# Altium PCB c1yc_ldm.PcbDoc (part 1 of 2)
Units mm, origin at the board's own origin, x right, y up, seen from the top; angles counter-clockwise.
Board outline 258.33 x 60.81 mm, 2 copper layers (Top Layer, Bottom Layer); 98 components, 53 nets, 234 pads, 310 vias.
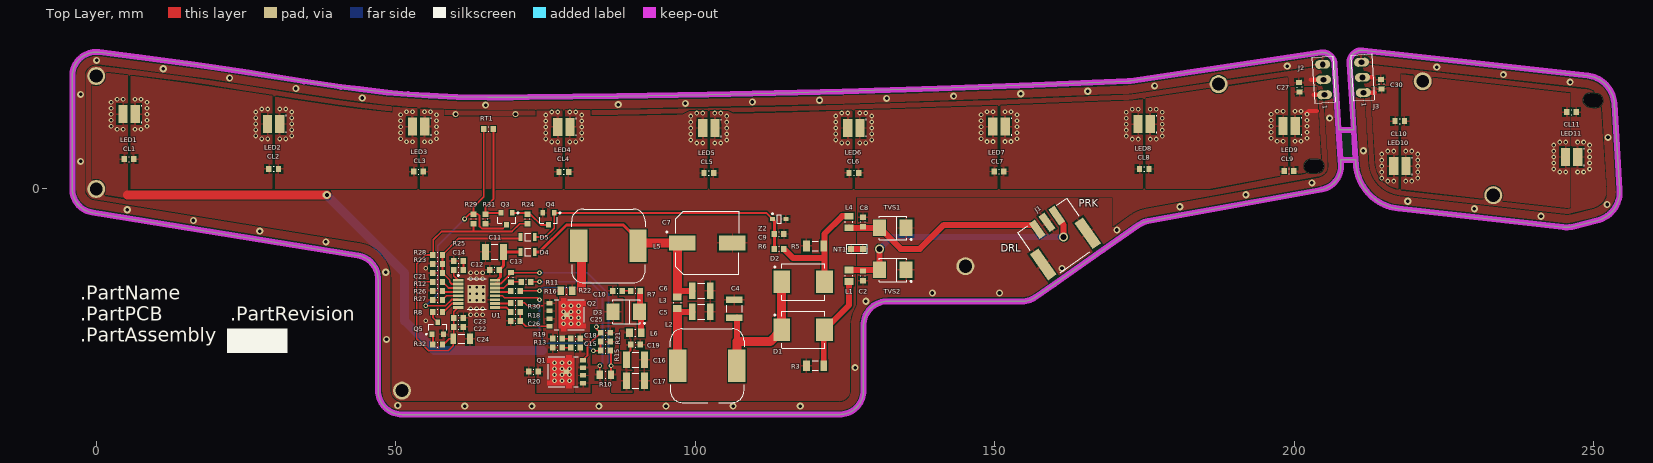
[diagram p0: Top Layer view]
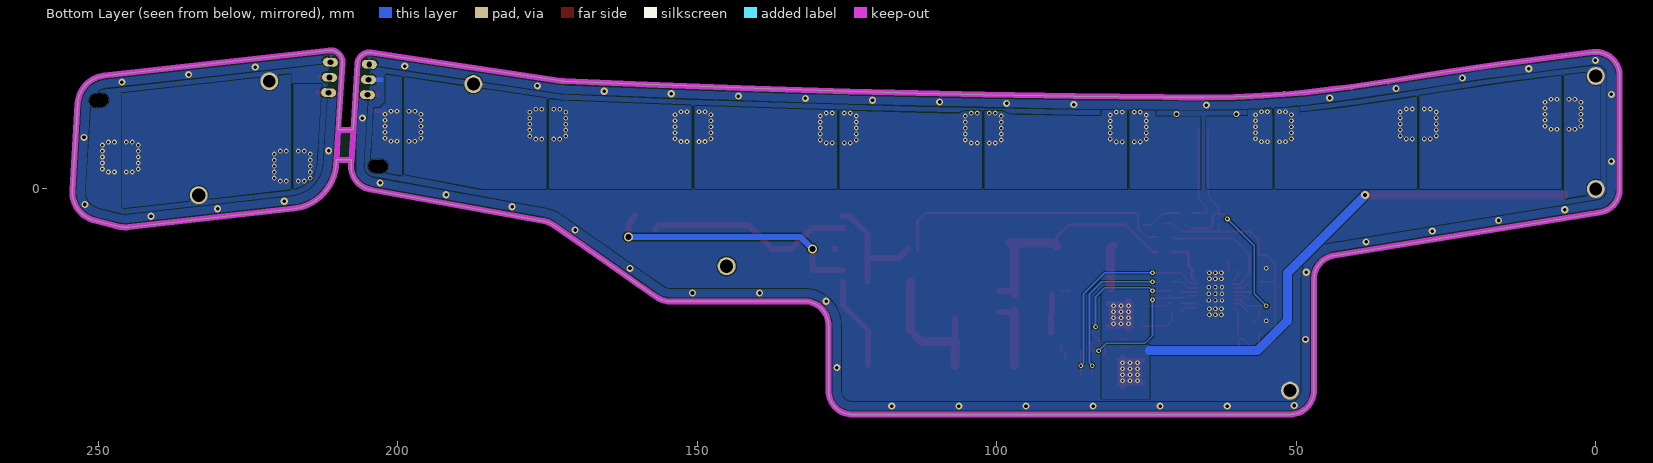
[diagram p1: Bottom Layer view, seen from below]

## Layer stack, top to bottom
Top Solder: solder mask 0.0102, Solder Resist, Dk 3.5
Top Layer: signal copper 0.0356
Dielectric1: dielectric 0.32, FR-4, Dk 4.8
Bottom Layer: signal copper 0.0356
Bottom Solder: solder mask 0.0102, Solder Resist, Dk 3.5

## Board outline
47.051,-33.654 ccw(c51.051,-33.654) 51.051,-37.654 124.084,-37.654 ccw(c124.084,-33.654) 128.084,-33.654 128.084,-22.763 cw(c132.084,-22.763) 132.084,-18.763 154.542,-18.763 ccw(c154.542,-14.763) 156.836,-18.039 159.855,-15.926 168.046,-10.19 174,-6.021 cw(c176.294,-9.298) 175.581,-5.362 204.501,-0.121 ccw(c203.788,3.815) 207.78,4.064 207.73,4.863 210.235,4.863 210.278,4.172 ccw(c218.263,4.671) 217.367,-3.279 244.89,-6.379 ccw(c245.45,-1.41) 246.668,-6.26 250.546,-5.285 ccw(c249.328,-0.436) 254.318,-0.124 253.42,14.259 ccw(c248.43,13.947) 248.989,18.916 211.445,23.145 ccw(c211.221,21.157) 209.225,21.033 209.923,9.863 207.418,9.863 206.728,20.917 ccw(c204.732,20.792) 204.436,22.77 172.683,18.027 cw(c172.092,21.983) 172.257,17.987 172.257,17.988 cw(c15.57,3785.374) 124.644,16.309 113.317,16.009 102.13,15.754 87.024,15.485 72.152,15.325 69.51,15.309 65.368,15.303 60.194,15.382 55.543,15.578 52.059,15.814 48.579,16.127 43.944,16.653 40.857,17.063 34.69,17.982 25.447,19.456 19.285,20.396 15.177,20.975 6.956,22.031 0.492,22.833 ccw(c0,18.863) -4,18.863 -4,0 ccw(c0,0) -0.638,-3.949 43.688,-11.107 cw(c43.051,-15.055) 47.051,-15.055

## Design rules (kind name [scope] priority, off if disabled: settings)
Clearance Clearance_Gnd [(InNamedPolygon('Top Ground') OR InNamedPolygon('Bottom Ground')) vs (OnLayer('Keep-Out Layer'))] p1: gap=1.75
Clearance Clearance_LED [(InNamedPolygon('Top LED') OR InNamedPolygon('Bottom LED')) vs (OnLayer('Keep-Out Layer'))] p2: gap=2.75
Clearance Clearance_Edge_LED [(InNamedPolygon('Top Edge LED') OR InNamedPolygon('Bottom Edge LED')) vs (OnLayer('Keep-Out Layer'))] p3: gap=1.75
Clearance Clearance_Dual_LED [(InNamedPolygon('Top Dual LED') OR InNamedPolygon('Bottom Dual LED')) vs (OnLayer('Keep-Out Layer'))] p4: gap=2.75
Clearance [All] p5: gap=0.2
HoleSize [All] p1: absolutevalues=TRUE maxlimit=5 minlimit=0.025 maxpercent=80.000 minpercent=20.000
MinimumAnnularRing [All] p1: minimumring=0.127
MinimumSolderMaskSliver [All] p1: minsoldermaskwidth=0.152
PolygonConnect PolygonConnect_Direct [InComponentClass('Direct')] p1: connectstyle=Direct reliefconductorwidth=0.254 reliefentries=4 polygonreliefangle="90 Angle" airgapwidth=0.254
PolygonConnect PolygonConnect_Via [IsVia] p2: connectstyle=Direct reliefconductorwidth=0.254 reliefentries=4 polygonreliefangle="90 Angle" airgapwidth=0.254
PolygonConnect PolygonConnect_Mount [InPadClass('Mount')] p3: connectstyle=Direct reliefconductorwidth=0.254 reliefentries=4 polygonreliefangle="90 Angle" airgapwidth=0.254
PolygonConnect [All] p4: connectstyle=Relief reliefconductorwidth=0.3 reliefentries=4 polygonreliefangle="90 Angle" airgapwidth=0.3
RoutingVias [All] p1: holewidth=0.4 width=0.8 viastyle="Through Hole" minholewidth=0.4 minwidth=0.8 maxholewidth=1 maxwidth=2
SilkToSilkClearance [All] p1: silktosilkclearance=0.152
SilkToSolderMaskClearance [IsPad] p1: minsilkscreentomaskgap=0.152 clearancetoexposedcopper=TRUE
SolderMaskExpansion [All] p1: expansion=0.102
Width [All] p1: maxlimit=2 minlimit=0.3 preferedwidth=0.3
26 further rules are at their usual default settings.

## Classes and differential pairs
component class DualFootprintDiode: D1 D2
pad class Mount: Free-0 Free-1 Free-3 Free-4 Free-5 U1-17

## Components (designator, comment, footprint, x,y, rotation, side; value= is the part's Value field where it differs from the comment)
C2 "100nF" CAPC0603(1608)100_N 128,-14.5 r90 top
C4 "2.2uF" CAPC1210(3225)230_N 106.5,-20 r270 top
C5 "2.2uF" CAPC1210(3225)230_N 101,-20.5 r180 top
C6 "4.7uF" CAPC1210(3225)280_N 101,-17 r180 top
C7 "100u, 50V" "146CT1 Series 1010" 102,-9 r0 top
C8 "100nF" CAPC0603(1608)100_N 128,-5.535 r270 top
C9 "100nF" CAPC0603(1608)100_N 114,-7.5 r180 top
C10 "2.2nF" CAPC0603(1608)100_N 87,-17 r180 top
C11 "2.2uF" CAPC1210(3225)230_N 66.5,-10.5 r0 top
C12 "100nF" CAPC0603(1608)100_N 66.5,-13.5 r0 top
C13 "100nF" CAPC0603(1608)100_N 69.25,-14.75 r90 top
C14 "330nF" CAPC0603(1608)100_N 60.5,-13.5 r180 top
C15 "2.2nF" CAPC0603(1608)100_N 80,-26.5 r180 top
C16 "4.7uF" CAPC1210(3225)280_N 90,-28.5 r180 top
C17 "4.7uF" CAPC1210(3225)280_N 90,-32 r180 top
C18 "2.2nF" CAPC0603(1608)100_N 80,-25 r180 top
C19 "100nF" CAPC0603(1608)100_N 90,-26 r180 top
C21 "10nF" CAPC0603(1608)100_N 57,-14 r0 top
C22 "100nF" CAPC0603(1608)100_N 60.5,-23 r180 top
C23 "1uF" CAPC0603(1608)100_N 60.5,-21.5 r180 top
C24 "10uF" CAPC1206(3216)190_L 61,-25 r180 top
C25 "10nF" CAPC0603(1608)100_N 85,-24 r180 top
C26 "10nF" CAPC0603(1608)100_N 70,-22 r0 top
C27 "10nF" CAPC0603(1608)100_N 200.843,16.993 r273 top
C30 "10nF" CAPC0603(1608)100_N 214.5,17.5 r273 top
CL1 "10nF" CAPC0603(1608)100_N 5.48,4.982 r180 top
CL2 "10nF" CAPC0603(1608)100_N 29.63,3.358 r180 top
CL3 "10nF" CAPC0603(1608)100_N 53.805,2.898 r180 top
CL4 "10nF" CAPC0603(1608)100_N 78.05,2.854 r180 top
CL5 "10nF" CAPC0603(1608)100_N 102.259,2.67 r180 top
CL6 "10nF" CAPC0603(1608)100_N 126.468,2.687 r180 top
CL7 "10nF" CAPC0603(1608)100_N 150.708,2.901 r180 top
CL8 "10nF" CAPC0603(1608)100_N 174.95,3.322 r180 top
CL9 "10nF" CAPC0603(1608)100_N 199.124,2.975 r180 top
CL10 "10nF" CAPC0603(1608)100_N 217.604,11.318 r180 top
CL11 "10nF" CAPC0603(1608)100_N 246.298,12.831 r180 top
D1 "3A" NRVBS3 118,-23.5 r0 top
D2 "3A" NRVBS3 118,-15.5 r0 top
D3 "2A" "OnSemi SMB Case 403A-03" 88.5,-20.5 r180 top
D4 "1N4148WS" SOD323F 72,-10.5 r0 top
D5 "1N4148WS" SOD323F 72,-8 r0 top
J1 "502352-0300" 502352-0300 163.377,-12.239 r35 top locked
J2 "A03-P029-A" A03-P029-A 204.89,18.257 r273.58 top
J3 "A03-P029-A" A03-P029-A 211.38,18.622 r273.58 top
L1 "30R" BLM21PG 125.668,-14.5 r90 top
L2 "33uH" CDRH127/L125 102,-29.5 r90 top
L3 "120R" BLM21PG 97,-19 r270 top
L4 "30R" BLM21PG 125.668,-5.5 r270 top
L5 "47uH" CDRH127/L125 85.5,-9.5 r90 top
L6 "120R" BLM21PG 90,-24 r0 top
LED1 "NJSW172" NJSW172 5.48,12.482 r180 top
LED2 "NJSW172" NJSW172 29.633,10.859 r180 top
LED3 "NJSW172" NJSW172 53.806,10.398 r180 top
LED4 "NJSW172" NJSW172 78.049,10.354 r180 top
LED5 "NJSW172" NJSW172 102.262,10.17 r180 top
LED6 "NJSW172" NJSW172 126.469,10.187 r180 top
LED7 "NJSW172" NJSW172 150.708,10.401 r180 top
LED8 "NJSW172" NJSW172 174.95,10.821 r180 top
LED9 "NJSW172" NJSW172 199.124,10.475 r180 top
LED10 "NJSW172" NJSW172 217.605,3.818 r180 top
LED11 "NJSW172" NJSW172 246.298,5.331 r180 top
NT1 "Net Tie" Net_Tie_SMT_1mm 127,-10 r180 top net-tie
Q1 "NVMFS5113PL" "ONSEMI DFN5 5x6 CASE 488AA Issue H" 78.5,-30.5 r270 top
Q2 "NVMFS5826NL" "ONSEMI DFN5 5x6 CASE 488AA Issue H" 78.5,-21 r90 top
Q3 "2V7002L" "OnSemi SOT-23 Case 318-08 Issue AP" 68.5,-5 r270 top
Q4 "2V7002L" "OnSemi SOT-23 Case 318-08 Issue AP" 75.5,-5 r270 top
Q5 "2V7002L" "OnSemi SOT-23 Case 318-08 Issue AP" 57,-23.25 r90 top
R3 "1K" RESC1206(3216)_N 120,-29.5 r0 top
R5 "1K" RESC1206(3216)_N 120,-9.5 r0 top
R6 "10K" RESC0603(1608)_N 114,-10 r0 top
R7 "10R" RESC0603(1608)_N 90,-17 r180 top
R8 "15K" RESC0603(1608)_N 57,-20.5 r0 top
R10 "Bin Table" RESC0805(2012)_N 85,-31 r0 top
R11 "150R" RESC0603(1608)_N 71.75,-15.5 r0 top
R12 "10K" RESC0603(1608)_N 57,-15.5 r180 top
R13 "10R" RESC0603(1608)_N 77,-26.5 r180 top
R15 "4K3" RESC0603(1608)_N 85,-27 r0 top
R16 "150R" RESC0603(1608)_N 70,-17 r0 top
R18 "0R" RESC0603(1608)_N 70,-20.5 r0 top
R19 "10R" RESC0603(1608)_N 77,-25 r180 top
R20 "10K" RESC0603(1608)_N 73,-30.5 r0 top
R21 "180K" RESC0603(1608)_N 85,-25.5 r180 top
R22 "0.039R" RESC0805(2012)_N 78.5,-17 r180 top
R23 "10K" RESC0603(1608)_N 57,-12.5 r0 top
R24 "10K" RESC0603(1608)_N 72,-5 r270 top
R25 "270R" RESC0603(1608)_N 60.5,-12 r0 top
R26 "75K" RESC0603(1608)_N 57,-17 r0 top
R27 "100K" RESC0603(1608)_N 57,-18.5 r0 top
R28 "100K" RESC0603(1608)_N 57,-11 r180 top
R29 "510R" RESC0603(1608)_N 63,-5 r270 top
R30 "1.5K" RESC0603(1608)_N 70,-19 r0 top
R31 "39R" RESC0603(1608)_N 65,-5 r90 top
R32 "10K" RESC0603(1608)_N 57,-26 r0 top
RT1 "10K" RESC0603(1608)_N 65.5,10 r180 top
TVS1 "1SMB36" "OnSemi SMB Case 403C-01" 133,-13.5 r180 top
TVS2 "1SMB36" "OnSemi SMB Case 403C-01" 133,-6.5 r180 top
U1 "A6271" A6268_LP 63.5,-17.5 r0 top
Z2 "5v1" MM3Z 114,-5 r0 top

## Footprints (in the part's own frame and the unit in brackets; to place one, negate y for a bottom-side part, rotate by r counter-clockwise, add the part's x,y. Pads: shape width x height; smd on the part's side, far side on the other; paste and mask are expansions set on the pad)
"146CT1 Series 1010" [mm] "Size Code 1010, Electrolytic Vishay"
  rect 4.4x2.5 smd: 1(-4.2,0) 2(4.2,0)
  silkscreen extent -6.87,-5.25 5.25,5.25, body extent -6.05,-5.25 6.05,5.25, height 10.55
502352-0300 [mm] "Duraclik header, right angle SMT, 3 circuits"
  rect 1.2x3.2 smd: 1(2,8.13) 2(0,8.13) 3(-2,8.13)
  rect 1.7x5.3 smd: 4(4.55,2.75) 5(-4.55,2.75)
  silkscreen extent -5,0 5,9.5, body extent -5,0 5,9.4, height 6.41
A03-P029-A [mm] "Panta 3 pin flex ribbon"
  oval 1.5x2.5 hole 0.95: 1(2.54,0) 2(0,0) 3(-2.54,0)
  silkscreen extent -3.81,-1.75 3.81,1.75
A6268_LP [mm] "TSSOP with exposed thermal pad"
  rect 1.7x0.45 smd: 1(-3.05,2.275) 2(-3.05,1.625) 3(-3.05,0.975) 4(-3.05,0.325) 5(-3.05,-0.325) 6(-3.05,-0.975) 7(-3.05,-1.625) 8(-3.05,-2.275) 9(3.05,-2.275) 10(3.05,-1.625) 11(3.05,-0.975) 12(3.05,-0.325) 13(3.05,0.325) 14(3.05,0.975) 15(3.05,1.625) 16(3.05,2.275)
  rect 3x3 smd: 17(0,0)
  silkscreen extent -3.17,-2.55 1.6,3.17, body extent -2.25,-2.55 2.25,2.55, height 1.2
BLM21PG [mm] "Chip Inductor, 2-Leads, Body 2.00x1.25mm, IPC Medium Density"
  rect 1.13x1.45 smd: 1(-0.965,0) 2(0.965,0)
  silkscreen extent -0.1,-0.63 0.1,0.63, body extent -1.1,-0.72 1.1,0.72, height 1.05
CAPC0603(1608)100_N [mm] "Chip Capacitor, Body 1.6x0.8mm, Height 1.0mm, IPC Medium Density"
  rect 0.9x1 smd: 1(-0.8,0) 2(0.8,0)
  silkscreen extent -0.05,-0.4 0.05,0.4, body extent -0.87,-0.48 0.88,0.47, height 1
CAPC1206(3216)190_L [mm] "Chip Capacitor, Body 3.2x1.6mm, Height 1.9mm, IPC High Density"
  rect 0.95x1.7 smd: 1(-1.4,0) 2(1.4,0)
  silkscreen extent -0.55,-0.75 0.55,0.75, body extent -1.7,-0.9 1.7,0.9, height 1.9
CAPC1210(3225)230_N [mm] "Chip Capacitor, Body 3.2x2.5mm, Height 2.3mm, IPC Medium Density"
  rect 1.15x2.7 smd: 1(-1.5,0) 2(1.5,0)
  silkscreen extent -0.55,-1.25 0.55,1.25, body extent -1.7,-1.35 1.7,1.35, height 2.3
CAPC1210(3225)280_N [mm] "Chip Capacitor, Body 3.2x2.5mm, Height 2.8mm, IPC Medium Density"
  rect 1.15x2.7 smd: 1(-1.5,0) 2(1.5,0)
  silkscreen extent -0.55,-1.25 0.55,1.25, body extent -1.7,-1.4 1.7,1.4, height 2.8
CDRH127/L125 [mm] "Sumida SMD Shielded Automotive Power Inductor"
  rect 5.4x2.9 smd: 1(0,4.95) 2(0,-4.95)
  silkscreen extent -6.15,-6.15 6.15,6.15, body extent -6.16,-6.16 6.16,6.16, height 8
MM3Z [mm] "TSOP, 2-Leads, Body 1.25x1.70mm, Pitch 1.27mm, IPC Medium Density"
  rect 0.83x0.63 smd: 1(-1.115,0) 2(1.115,0)
  silkscreen extent -1.24,-0.7 0.35,0.99, body extent -0.9,-0.7 0.9,0.7, height 1.1
Net_Tie_SMT_1mm [mm] "SMT Net Tie - 1mm trace width"
  rect 1x1 smd: 1(-1,0) 2(1,0)
  Top Layer region: -0.5,-0.5 0.5,-0.5 0.5,0.5 -0.5,0.5
  silkscreen extent -1.75,-0.75 1.75,0.75
NJSW172 [mm] "Nichia White LED"
  rect 1.55x3 smd: 1(-1.025,0) 2(1.025,0)
  silkscreen extent -2.1,-1.5 -2.1,1.5, body extent -1.5,-1.5 1.5,1.5, height 0.81
NRVBS3 [mil] "Molded Diode, 2-Leads, Body 6.85x5.84mm, IPC Medium Density"
  rect 110x150 smd: 1(-140.49,0) 2(140.49,0)
  silkscreen extent -191,-120 142,120, body extent -140,-120 140,120, height 95
"ONSEMI DFN5 5x6 CASE 488AA Issue H" [mm] "ONSEMI DFN5 5x6 SO-8FL CASE 488AA Issue H"
  rect 0.75x1 smd: 1(1.905,2.795) 2(0.635,2.795) 3(-0.635,2.795) 4(-1.905,2.795) 5(0,0)
  Top Layer region: -2.775,0 -2.775,0.905 -2.28,0.905 -2.28,1.33 2.28,1.33 2.28,0.905 2.775,0.905 2.775,0 2.28,0 2.28,-3.2 1.53,-3.2 1.53,-2.725 -1.53,-2.725 -1.53,-3.2 -2.28,-3.2 -2.28,0
  silkscreen extent -2.5,-3 2.5,2, body extent -2.5,-3 2.5,3, height 1.1
"OnSemi SMB Case 403A-03" [mm] "Molded Diode, 2-Leads, Body 4.33x3.63mm, IPC Medium Density"
  rect 2.159x2.743 smd: 1(-2.21,0) 2(2.21,0)
  silkscreen extent -3.16,-2 2.3,2.05, body extent -2.3,-1.98 2.3,1.97, height 2.48
"OnSemi SMB Case 403C-01" [mm] "Molded Diode, 2-Leads, Body 4.31x3.55mm, IPC Medium Density"
  rect 2.159x2.743 smd: 1(-2.21,0) 2(2.21,0)
  silkscreen extent -3.16,-1.95 2.3,2.05, body extent -2.29,-1.91 2.28,1.91, height 2.41
"OnSemi SOT-23 Case 318-08 Issue AP" [mm] "SOT23, 3-Leads, Body 2.92x2.37mm, Pitch 0.95mm, IPC Medium Density"
  rect 0.9x0.8 smd: 1(-1,0.95) 2(-1,-0.95) 3(1,0)
  silkscreen extent -1.12,-1.5 0.7,2.03, body extent -0.7,-1.52 0.7,1.52, height 1.11
RESC0603(1608)_N [mm] "Chip Resistor, Body 1.6x0.8mm, IPC Medium Density"
  rect 0.9x1 smd: 1(-0.8,0) 2(0.8,0)
  silkscreen extent -0.05,-0.4 0.05,0.4, body extent -0.85,-0.47 0.85,0.47, height 0.6
RESC0805(2012)_N [mm] "Chip Resistor, Body 2.0x1.3mm, IPC Medium Density"
  rect 1.05x1.4 smd: 1(-0.95,0) 2(0.95,0)
  silkscreen extent -0.05,-0.6 0.05,0.6, body extent -1.1,-0.67 1.1,0.68, height 0.7
RESC1206(3216)_N [mm] "Chip Resistor, Body 3.2x1.6mm, IPC Medium Density"
  rect 1.15x1.8 smd: 1(-1.45,0) 2(1.45,0)
  silkscreen extent -0.5,-0.8 0.5,0.8, body extent -1.67,-0.87 1.67,0.87, height 0.75
SOD323F [mm] "Small Outline Diode"
  rect 0.65x1.35 smd: 1(-1.2,0) 2(1.2,0)
  silkscreen extent -0.5,-0.63 0.5,0.63, body extent -1.25,-0.63 1.25,0.63, height 0.75

## Part data
C2 C8 C9 C12 C13 C19 C22: library part CMP-1035-02592-1, "CAP 100nF 50V ±10% 0603 (1608 Metric) Thickness 1mm SMD"
C4 C5 C11: library part CMP-1038-02095-1, "CAP 2.2uF 35V ±20% 1210 (3225 Metric) Thickness 2.3mm SMD"
C6 C16 C17: library part CMP-1038-02162-1, "CAP 4.7uF 50V ±10% 1210 (3225 Metric) Thickness 2.8mm SMD"
C7: library part Cap_Electro_Vishay, "CAP ALUM 100UF 50V 20% SMD 1010"
C10 C15 C18: library part CMP-1035-02039-1, "CAP 2.2nF 50V ±10% 0603 (1608 Metric) Thickness 1mm SMD"
C14: library part CMP-1035-02321-1, "CAP330nF 50V ±10% 0603 (1608 Metric) Thickness 1mm SMD"
C21 C25 C26 C27 C30 CL1 CL2 CL3 CL4 CL5 CL6 CL7 CL8 CL9 CL10 CL11: library part CMP-1035-02321-1, "CAP 10nF 50V ±10% 0603 (1608 Metric) Thickness 1mm SMD"
C23: library part CMP-1035-02706-1, "CAP 1uF 35V ±10% 0603 (1608 Metric) Thickness 1mm SMD"
C24: library part CMP-1037-04974-1, "CAP 10uF 16V ±10% 1206 (3216 Metric) Thickness 1.9mm SMD"
D1 D2: library part NRVBS3, "NRVBS3"
D3: library part NBRS2H, "NBRS2H"
J1: "Duraclik header, right angle SMT, 3 circuits"
J2 J3: "Panta 3 pin flex ribbon"
L1 L4: library part BLM21PG300, "Ferrite chip, 4A, 20ohm at 100 MHz, 0805 size"
L2: library part CDRH127/L125-33u, "Power Inductor"
L3 L6: library part BLM21PG121, "Ferrite chip, 3.0A, 120ohm at 100 MHz, 0805 size"
L5: library part CDRH127/L125-47u, "Power Inductor"
LED1 LED2 LED3 LED4 LED5 LED6 LED7 LED8 LED9 LED10 LED11: "Nichia White LED"
NT1: library part Net_Tie
Q1: "P Channel Mosfet, 60V, 64A"
Q2: "N Channel Mosfet, 60V, 26A"
Q3 Q4 Q5: "N Channel Mosfet, 60V, 100mA"
R3 R5: library part CMP-1014-00510-1, "1K 0.25W 1% 1206 (3216 Metric)  SMD"
R6 R12 R20 R23 R24 R32: library part CMP-1012-00623-1, "10K 0.1W 1% 0603 (1608 Metric)  SMD"
R7 R13 R19: library part CMP-1012-00284-1, "10R 0.1W 1% 0603 (1608 Metric)  SMD"
R8: library part CMP-1012-00623-1, "15K 0.1W 1% 0603 (1608 Metric)  SMD"
R10 R22: library part CMP-1013-00001-1, "Jumper 0805 (2012 Metric)"
R11 R16: library part CMP-1012-00415-1, "150R 0.1W 1% 0603 (1608 Metric)  SMD"
R15: library part CMP-1012-00623-1, "4K3 0.1W 1% 0603 (1608 Metric)  SMD"
R18: library part CMP-1012-00415-1, "0R 0.1W 1% 0603 (1608 Metric)  SMD"
R21: library part CMP-1012-00623-1, "180K 0.1W 1% 0603 (1608 Metric)  SMD"
R25: library part CMP-1012-00623-1, "270R 0.1W 1% 0603 (1608 Metric)  SMD"
R26: library part CMP-1012-00712-1, "75K 0.1W 1% 0603 (1608 Metric)  SMD"
R27: library part CMP-1012-00712-1, "62K 0.1W 1% 0603 (1608 Metric)  SMD"
R28: library part CMP-1012-00623-1, "100K 0.1W 1% 0603 (1608 Metric)  SMD"
R29: library part CMP-1012-00623-1, "510R 0.1W 1% 0603 (1608 Metric)  SMD"
R30: library part CMP-1012-00415-1, "1.5K 0.1W 1% 0603 (1608 Metric)  SMD"
R31: library part CMP-1012-00623-1, "39R 0.1W 1% 0603 (1608 Metric)  SMD"
RT1: library part CMP-1012-00623-1, "10K 0.1W 1% 0603 Thermistor"
TVS1 TVS2: "TVS 600W, 36V"
U1: "High Current LED Buck Boost Controller"
Z2: library part MM3Z5V1, "Zener Diode, SOD323, 5.1v, 200 mW"

## Free pads (board coordinates)
  round 3 hole 2.2: 0(51.051,-33.654) 1(0,18.863) 1(145.098,-12.885) 3(187.366,17.511) 5(233.226,-1.04)
  oval 3.2x2.2 hole 2.2 slot 3.2 at 1 deg unplated rot 1: 0(203.288,3.805)
  oval 3.2x2.2 hole 2.2 slot 3.2 at 173.57 deg unplated rot 173.57: 0(249.887,14.789)
  round 3 hole 2.1: 1(0,0) 4(221.438,17.994)

## Via types
v1: diameter 0.8, hole 0.4, Top Layer to Bottom Layer, 246 vias
v2: diameter 1.2, hole 0.6, Top Layer to Bottom Layer, 50 vias
v3: diameter 0.7, hole 0.4, Top Layer to Bottom Layer, 9 vias
v4: diameter 1.5, hole 1, Top Layer to Bottom Layer, 2 vias
v5: diameter 1, hole 0.6, Top Layer to Bottom Layer, 2 vias
v6: diameter 1.4, hole 0.7, Top Layer to Bottom Layer, 1 vias

## Nets (pads, with @x,y where several pads share a name; then routed paths per layer and width w, separated by ;. In a path a pad name is that pad's centre, name@x,y a point inside that pad or via, vN(x,y) a via of type N, cw(c..) or ccw(c..) an arc to the next point about the centre after c; other vN are vias at no path point)
COMP: C14.2 U1.1 | length 2
  Top Layer w0.3: C14.2@59.7,-13.5 59.7,-14.475 U1.1@60.45,-15.225
DGND: C30.1 CL11.1 J3.2 LED11.1 pad.4 pad.5 | length 1.6
  Top Layer w0.75: J3.2@211.38,18.622 213.017,18.622
  other v1: 247.298,2.831 248.298,2.831 249.298,3.331 249.298,4.331 249.298,5.331 249.298,6.331 249.298,7.331 247.298,7.831 248.298,7.831
DITH: R27.2 U1.5 | length 2.9
  Top Layer w0.3: R27.2@57.8,-18.5 58.475,-17.825 U1.5@60.45,-17.825
DR: Q3.3 R29.1 RT1.2 U1.6 | length 47.6
  Top Layer w0.3: v1(55,-19.5) 58.3,-19.5 59.325,-18.475 U1.6@60.45,-18.475 ; v1(61.5,-5) 62.3,-4.2 R29.1@63,-4.2 ; RT1.2@64.7,10 64.7,-1.3 63,-3 R29.1@63,-4.2 ; Q3.3@68.5,-6 67.9,-6.6 64.35,-6.6 64,-6.25 64,-4.5 63.7,-4.2 R29.1@63,-4.2
  Bottom Layer w0.3: v1(55,-19.5) 57,-17.5 57,-9.5 v1(61.5,-5)
DRL: D2.2 L4.1 R5.2 R6.2 | length 20.6
  Top Layer w1: R6.2@114.8,-10 116.301,-11.5 121.5,-11.5 ; D2.2@121.569,-15.5 121.569,-7.5 124.534,-4.535 L4.1@125.668,-4.535
"DRL IN": C8.2 J1.3 L4.2 TVS2.2 | length 34.8
  Top Layer w1: L4.2@125.668,-6.465 125.703,-6.5 TVS2.2@130.79,-6.5 134.29,-10 137.5,-10 141.5,-6 156.349,-6 J1.3@157.076,-6.726
FLT: R12.1 U1.3 | length 3.1
  Top Layer w0.3: R12.1@57.8,-15.5 58.825,-16.525 U1.3@60.45,-16.525
GND: C4.1 C5.1 C6.1 C7.2 C9.1 C11.1 C12.1 C16.1 C17.1 C19.1 C21.1 C22.1 C23.1 C24.1 C25.1 C26.1 C27.1 J2.2 NT1.2 pad.0@51.051,-33.654 pad.1@0,0 pad.1@0,18.863 pad.3 Q4.2 Q5.2 R3.1 R5.1 R20.1 R21.1 R22.1 R23.1 R25.1 R26.1 R27.1 R31.1 U1.11 U1.17 Z2.2 | length 4.3
  Top Layer w0.75: 202.757,18.257 J2.2@204.89,18.257
  Bottom Layer w0.75: 202.757,18.257 J2.2@204.89,18.257
  other v1: 55,-22 62.5,-21 63.5,-21 64.5,-21 62.5,-20 63.5,-20 64.5,-20 62.5,-15 63.5,-15 64.5,-15 62.5,-14 63.5,-14 64.5,-14 55,-13.25
  other v3: 62.4,-18.6 63.5,-18.6 64.6,-18.6 62.4,-17.5 63.5,-17.5 64.6,-17.5 62.4,-16.4 63.5,-16.4 64.6,-16.4
  other v5: 60,12.5 70,12.5
GND_IN: C2.1 C8.1 J1.2 J1.4 J1.5 J2.3 NT1.1 pad.1@145.098,-12.885 TVS1.1 TVS2.1
  other v2: 61.523,-36.254 72.723,-36.254 83.923,-36.254 95.123,-36.254 106.323,-36.254 117.523,-36.254 50.323,-36.148 126.685,-29.812 48.45,-25.106 128.48,-18.757 139.593,-17.363 150.793,-17.363 48.321,-13.907 161.216,-13.264 38.34,-8.825 27.284,-7.04 170.39,-6.84 16.227,-5.255 5.17,-3.469 180.903,-2.975 191.923,-0.978 202.944,1.019 -2.6,4.597 205.893,11.823 65,14 87.149,14.088 98.347,14.287 109.544,14.523 120.741,14.806 131.936,15.126 44.423,15.19 143.13,15.499 -2.6,15.797 154.323,15.888 165.515,16.322 33.337,16.781 176.68,17.209 22.273,18.525 11.181,20.077 198.834,20.518 0.068,21.466
IREF: C21.2 D5.1 R23.2 R28.1 U1.2 | length 20.8
  Top Layer w0.3: U1.2@60.45,-15.875 59.375,-15.875 59,-15.5 59,-15.2 C21.2@57.8,-14 R23.2@57.8,-12.5 R28.1@57.8,-11 60.55,-8.25 70.55,-8.25 D5.1@70.8,-8
LGND: J3.3
  other v2: 241.188,-4.554 230.059,-3.3 252.215,-2.592 218.929,-2.046 211.543,6.373 252.371,8.607 246.032,17.841 234.903,19.094 223.773,20.348
LN: C13.1 R11.1 U1.14 | length 4.8
  Top Layer w0.3: U1.14@66.55,-16.525 68.025,-16.525 69,-15.55 C13.1@69.25,-15.55 69.3,-15.5 R11.1@70.95,-15.5
LP: C13.2 C16.2 C17.2 C19.2 L6.1 R10.2 R15.2 U1.15 | length 40.3
  Top Layer w0.3: U1.15@66.55,-15.875 66.625,-15.8 67.545,-15.8 69.25,-14.095 C13.2@69.25,-13.95 69.3,-14 v1(74,-14) ; R15.2@85.8,-27 85.95,-27.15 v1(85.95,-29.5) R10.2@85.95,-31 ; C16.2@88.5,-28.5 88.5,-27.6 89.2,-26.9 C19.2@89.2,-26
  Bottom Layer w0.3: v1(74,-14) 82.001,-14 85.5,-17.5 85.5,-29.05 v1(85.95,-29.5)
MOD: R16.1 U1.13 | length 2.7
  Top Layer w0.3: U1.13@66.55,-17.175 69.025,-17.175 R16.1@69.2,-17
NetC5_2: C5.2 L2.1 L3.2 | length 11.7
  Top Layer w1: L3.2@97,-19.965 97.535,-20.5 C5.2@99.5,-20.5
  Top Layer w1.5: L3.2@97,-20.5 97.05,-20.55 L2.1@97.05,-29.5
NetC9_2: C9.2 D5.2 Q4.1 R6.1 Z2.1 | length 48.7
  Top Layer w0.3: D5.2@73.2,-8 75,-8 76.45,-6.55 Q4.1@76.45,-4 111.885,-4 Z2.1@112.885,-5
  Top Layer w0.5: Z2.1@112.885,-5 113.2,-5.315 R6.1@113.2,-10 R6.1@113.2,-10.3
NetC10_1: C10.1 R7.2 | length 1.4
  Top Layer w0.3: C10.1@87.8,-17 R7.2@89.2,-17
NetC14_1: C14.1 R25.2 | length 1.5
  Top Layer w0.3: C14.1@61.3,-13.5 R25.2@61.3,-12
NetC15_1: C15.1 Q1.1 Q1.2 Q1.3 R10.1 R11.2 | length 26.5
  Top Layer w0.3: R11.2@72.55,-15.5 v1(74,-15.5) ; R10.1@84.05,-31 v1(84.05,-29.5)
  Bottom Layer w0.3: v1(74,-15.5) 82.501,-15.5 84.5,-17.5 84.5,-29.05 v1(84.05,-29.5)
NetC15_2: C15.2 R13.1 | length 1.4
  Top Layer w0.3: R13.1@77.8,-26.5 C15.2@79.2,-26.5
NetC18_2: C18.2 R19.1 | length 1.4
  Top Layer w0.3: R19.1@77.8,-25 C18.2@79.2,-25
NetC25_2: C25.2 Q1.4 R16.2 | length 25.7
  Top Layer w0.3: R16.2@70.8,-17 v1(74,-17) ; Q1.4@81.2,-28.595 82,-27.795 82,-26.2 C25.2@84.2,-24 83.5,-23.3 v1(83.5,-23)
  Bottom Layer w0.3: v1(74,-17) 74.5,-16.5 82,-16.5 83.5,-18 v1(83.5,-23)
NetC26_2: C26.2 Q2.4 R18.2 | length 6.9
  Top Layer w0.3: R18.2@70.8,-20.5 C26.2@70.8,-22 71.705,-22.905 Q2.4@75.705,-22.905 Q2.4@75.8,-22.905
NetC27_2: C27.2 CL9.1 J2.1 LED9.1 | length 3.7
  Top Layer w0.75: v1@202.004,12.643 202.377,13.017 203.736,13.017 ; 203.278,15.722 J2.1@205.048,15.722
  other v1: 200.124,7.975 201.124,7.975 202.124,8.475 202.124,9.475 202.124,10.475 202.124,11.475 202.124,12.475 200.124,12.975 201.124,12.975
NetC30_2: C30.2 CL10.2 J3.1 LED10.2 | length 2
  Top Layer w0.75: J3.1@211.652,16.201 J3.1@211.538,16.087 213.413,16.087
  other v1: 215.604,1.318 216.604,1.318 214.605,1.818 214.604,2.818 214.604,3.818 214.604,4.818 214.604,5.818 215.604,6.318 216.604,6.318
NetCL1_1: CL1.1 CL2.2 LED1.1 LED2.2
  other v1: 27.633,8.359 28.633,8.359 26.633,8.859 26.633,9.859 6.48,9.982 7.48,9.982 8.48,10.482 26.633,10.859 8.48,11.482 26.633,11.859 8.48,12.482 26.633,12.859 27.633,13.359 28.633,13.359 8.48,13.482 8.48,14.482 6.48,14.982 7.48,14.982
NetCL1_2: CL1.2 LED1.2 Q1.5 R13.2 R20.2 | length 84.7
  Top Layer w1.5: 5.241,-0.998 5.243,-1 v6(38.5,-1)
  Bottom Layer w1.5: v6(38.5,-1) 38.5,-1.041 51.5,-14.041 51.5,-22 56.5,-27 74.5,-27
  other v1: 76.5,-32 77.75,-32 79,-32 76.5,-31 77.75,-31 79,-31 76.5,-30 77.75,-30 79,-30 76.5,-29 77.75,-29 79,-29 3.48,9.982 4.48,9.982 2.48,10.482 2.48,11.482 2.48,12.482 2.48,13.482 2.48,14.482 3.48,14.982 4.48,14.982
NetCL2_1: CL2.1 CL3.2 LED2.1 LED3.2
  other v1: 51.805,7.898 52.805,7.898 30.633,8.359 31.633,8.359 50.805,8.398 32.633,8.859 50.805,9.398 32.633,9.859 50.805,10.398 32.633,10.859 50.805,11.398 32.633,11.859 50.805,12.398 32.633,12.859 51.805,12.898 52.805,12.898 30.633,13.359 31.633,13.359
NetCL3_1: CL3.1 CL4.2 LED3.1 LED4.2
  other v1: 76.05,7.854 77.05,7.854 54.805,7.898 55.805,7.898 75.05,8.354 56.805,8.398 75.05,9.354 56.805,9.398 75.05,10.354 56.805,10.398 75.05,11.354 56.805,11.398 75.05,12.354 56.805,12.398 76.05,12.854 77.05,12.854 54.805,12.898 55.805,12.898
NetCL4_1: CL4.1 CL5.2 LED4.1 LED5.2
  other v1: 100.263,7.67 101.263,7.67 79.05,7.854 80.05,7.854 99.263,8.17 81.05,8.354 99.263,9.17 81.05,9.354 99.263,10.17 81.05,10.354 99.263,11.17 81.05,11.354 99.263,12.17 81.05,12.354 100.263,12.67 101.263,12.67 79.05,12.854 80.05,12.854
NetCL5_1: CL5.1 CL6.2 LED5.1 LED6.2
  other v1: 103.263,7.67 104.263,7.67 124.469,7.687 125.469,7.687 105.263,8.17 123.469,8.187 105.263,9.17 123.469,9.187 105.263,10.17 123.469,10.187 105.263,11.17 123.469,11.187 105.263,12.17 123.469,12.187 103.263,12.67 104.263,12.67 124.469,12.687 125.469,12.687
NetCL6_1: CL6.1 CL7.2 LED6.1 LED7.2
  other v1: 127.469,7.687 128.469,7.687 148.709,7.901 149.709,7.901 129.469,8.187 147.709,8.401 129.469,9.187 147.709,9.401 129.469,10.187 147.709,10.401 129.469,11.187 147.709,11.401 129.469,12.187 147.709,12.401 127.469,12.687 128.469,12.687 148.709,12.901 149.709,12.901
NetCL7_1: CL7.1 CL8.2 LED7.1 LED8.2
  other v1: 151.709,7.901 152.709,7.901 172.95,8.321 173.95,8.321 153.709,8.401 171.95,8.821 153.709,9.401 171.95,9.821 153.709,10.401 171.95,10.821 153.709,11.401 171.95,11.821 153.709,12.401 171.95,12.821 151.709,12.901 152.709,12.901 172.95,13.321 173.95,13.321
NetCL8_1: CL8.1 CL9.2 LED8.1 LED9.2
  other v1: 197.124,7.975 198.124,7.975 175.95,8.321 176.95,8.321 196.124,8.475 177.95,8.821 196.124,9.475 177.95,9.821 196.124,10.475 177.95,10.821 196.124,11.475 177.95,11.821 196.124,12.475 177.95,12.821 197.124,12.975 198.124,12.975 175.95,13.321 176.95,13.321
NetCL10_1: CL10.1 CL11.2 LED10.1 LED11.2
  other v1: 218.604,1.318 219.604,1.318 220.604,1.818 220.604,2.818 244.298,2.831 245.298,2.831 243.298,3.331 220.604,3.818 243.298,4.331 220.604,4.818 243.298,5.331 220.604,5.818 218.604,6.318 219.604,6.318 243.298,6.331 243.298,7.331 244.298,7.831 245.298,7.831
NetD3_1: D3.1 L6.2 R7.1 | length 6.6
  Top Layer w1: 90.8,-17.5 90.8,-20.91 90.965,-21.075 L6.2@90.965,-24
NetQ2_1: Q2.1 Q2.2 Q2.3 R19.2 R22.2 R30.2 | length 3.9
  Top Layer w0.3: R30.2@70.8,-19 71.5,-19 71.992,-19.492 74.5,-19.492
NetQ3_1: Q3.1 Q4.3 R24.1 | length 6.9
  Top Layer w0.3: Q3.1@69.45,-4 71.8,-4 R24.1@72,-4.2 72.45,-4.2 74.25,-6 Q4.3@75.5,-6
NetQ3_2: Q3.2 R31.2 RT1.1 | length 17.4
  Top Layer w0.3: RT1.1@66.3,10 66.3,-1.7 65,-3 R31.2@65,-4.2 65.2,-4 Q3.2@67.55,-4
NetQ5_1: Q5.1 R32.1 | length 1.8
  Top Layer w0.3: Q5.1@56.05,-24.25 56.2,-24.4 R32.1@56.2,-26
NetQ5_3: Q5.3 R8.1 | length 2.1
  Top Layer w0.3: R8.1@56.2,-20.5 56.2,-21.45 Q5.3@57,-22.25
OSC: R26.2 U1.4 | length 3.2
  Top Layer w0.3: R26.2@57.475,-17.175 R26.2@57.975,-17.175 ; R26.2@57.8,-17 R26.2@57.975,-17.175 ; U1.4@60.45,-17.175 R26.2@57.975,-17.175
OVUV: R15.1 R21.2 U1.12 | length 26.5
  Top Layer w0.3: U1.12@66.55,-17.825 67.825,-17.825 68.15,-18.15 73.65,-18.15 v1(74,-18.5) ; v1(83,-27) R15.1@84.2,-27 R21.2@84.2,-25.5
  Bottom Layer w0.3: v1(74,-18.5) 74,-24.5 75.25,-25.75 81.75,-25.75 v1(83,-27)
"PARK IN": C2.2 J1.1 L1.2 TVS1.2 | length 44.1
  Top Layer w1: L1.2@125.668,-13.535 125.703,-13.5 TVS1.2@130.79,-13.5 v4(130.79,-10) ; J1.1@160.352,-4.432 161.5,-6 v4(161.5,-8)
  Bottom Layer w1: v4(130.79,-10) 132.79,-8 v4(161.5,-8)
PRK: D1.2 L1.1 R3.2 | length 15.8
  Top Layer w1: R3.2@121.45,-29.5 121.45,-23.619 D1.2@121.569,-23.5 125.668,-19.4 L1.1@125.668,-15.465
PWM: R8.2 U1.7 | length 3.2
  Top Layer w0.3: R8.2@57.8,-20.5 58.007,-20.5 59.383,-19.125 U1.7@60.45,-19.125
SG: R18.1 U1.9 | length 3
  Top Layer w0.3: U1.9@66.55,-19.775 68.475,-19.775 R18.1@69.2,-20.5
SP: R30.1 U1.10 | length 2.7
  Top Layer w0.3: U1.10@66.55,-19.125 69.075,-19.125 R30.1@69.2,-19